# EAGLE board Sound Activation 2019 - Extended (EAGLE 9.3.1)
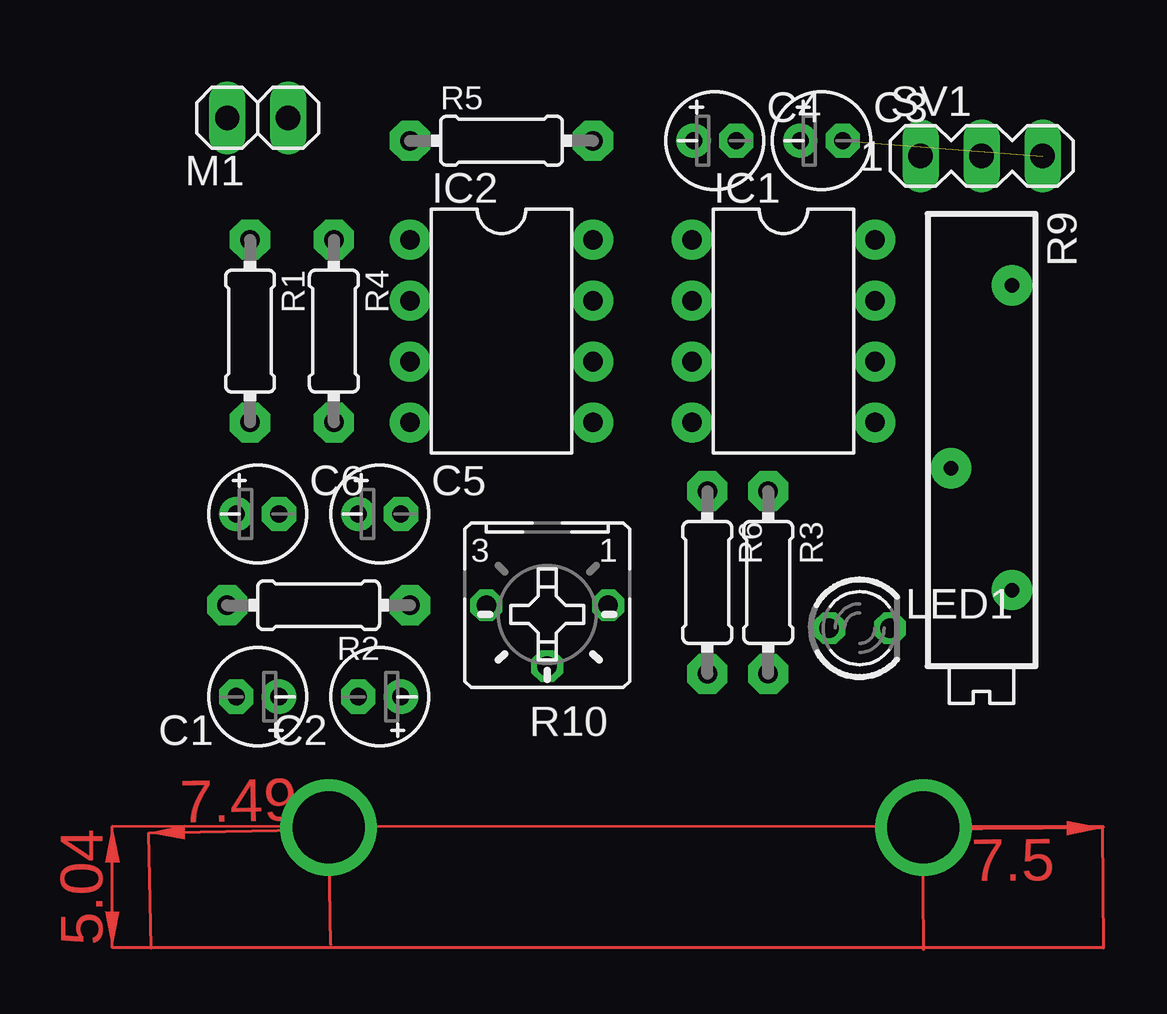
[diagram p0: board, top side]
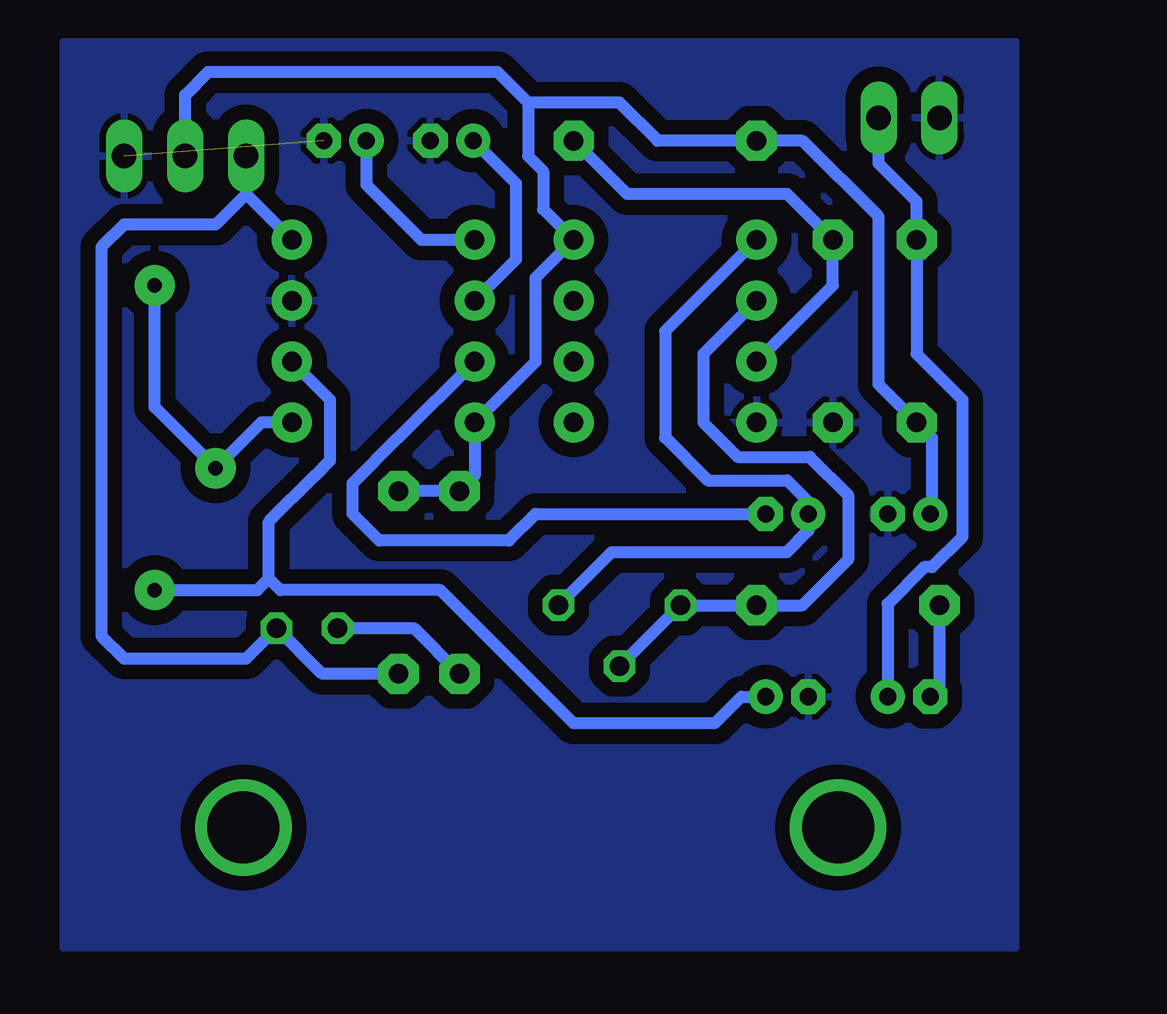
[diagram p1: board, bottom side, seen from below]

No outline drawn. Coordinates in mm, seen from the top.
Copper layers (1*16): Top 0.035mm / dielectric 1.5mm / Bottom 0.035mm
Design rules "default *": minimum track width 6mil, minimum drill 0.35mm, track to track 6mil, track to pad 6mil, pad to pad 6mil, via to via 6mil, smd to smd 6mil, copper to edge 40mil, drill to drill 6mil, minimum pad ring 10mil, minimum via ring 8mil, stop-mask expansion 4mil, vias tented up to drill 0mil, thermal gap 10mil

## Footprints (pad centres in the part's own frame; a part is rotated, then mirrored left to right if it is on the bottom)
E1,8-4 = drill 0.711 pad 1.422: + -0.889,0 | drill 0.711 pad 1.422 octagon: - 0.889,0
DIL08 = drill 0.813 pad 1.676: 1 -3.81,-3.81; 2 -1.27,-3.81; 3 1.27,-3.81; 4 3.81,-3.81; 5 3.81,3.81; 6 1.27,3.81; 7 -1.27,3.81; 8 -3.81,3.81
LED3MM = drill 0.813 octagon: A -1.27,0; K 1.27,0
1X02 = drill 1.016 long: 1 -1.27,0; 2 1.27,0
0204/7 = drill 0.813 pad 1.676 octagon: 1 -3.81,0; 2 3.81,0
RTRIM3006P = drill 0.61 pad 1.676: 1 -7.62,1.27; 2 0,-1.27; 3 5.08,1.27
B25P = drill 0.813 octagon: A -2.54,0; E 2.54,0; S 0,2.54
MA03-1 = drill 1.016 long: 1 -2.54,0; 2 0,0; 3 2.54,0

## Placement (x,y rotation side)
C1  1uF  [E1,8-4]  20.95,13.34 180 top
C2  0,1 uF  [E1,8-4]  26.04,13.34 180 top
C3  10 uF  [E1,8-4]  44.45,36.51 0 top
C4  2,2 uF  [E1,8-4]  40.01,36.51 0 top
C5  1uF  [E1,8-4]  26.04,20.95 0 top
C6  1uF  [E1,8-4]  20.95,20.95 0 top
IC1  LM567N  [DIL08]  42.86,28.57 270 top
IC2  LM358N  [DIL08]  31.11,28.57 270 top
LED1  [LED3MM]  46.04,16.19 0 top
M1  [1X02]  20.95,37.47 0 top
R1  1k  [0204/7]  20.64,28.57 270 top
R2  1k  [0204/7]  23.5,17.14 180 top
R3  330  [0204/7]  42.23,18.1 270 top
R4  1k  [0204/7]  24.13,28.57 270 top
R5  1k  [0204/7]  31.11,36.51 0 top
R6  330  [0204/7]  39.69,18.1 270 top
R9  10k  [RTRIM3006P]  51.12,22.86 270 top
R10  20k  [B25P]  33.02,17.14 180 top
SV1  [MA03-1]  51.12,35.88 0 top

## Library data of the parts
C1-C6 R1-R6 R9 = rcl
IC1 IC2 = linear
LED1 = led
M1 = pinhead
R10 = pot
SV1 = con-lstb; OC_FARNELL: unknown; OC_NEWARK: unknown

## Nets
GND: C2.- C3.- C4.- C6.- IC1.7 IC2.4 M1.1 R4.2 SV1.3
N$1: IC2.2 R2.1 R10.E R10.S
N$2: IC2.3 R4.1 R5.2
N$3: C1.+ M1.2 R1.1
N$4: C1.- R2.2
N$5: C2.+ IC1.6 R9.3
N$6: IC1.5 R9.1 R9.2
N$7: C5.+ IC2.1 R10.A
N$8: IC1.8 LED1.K R3.2 SV1.1
N$9: LED1.A R6.2
N$10: C5.- IC1.3
N$12: C3.+ IC1.1
N$13: C4.+ IC1.2
VCC: C6.+ IC1.4 IC2.8 R1.2 R3.1 R5.1 R6.1 SV1.2

## Tracks (layer width: path | path; a pad name or v marks a point on that pad's centre or on a via)
GND  (1 unrouted)
  Bottom 0.508: 45.34,36.89 C3.-
  pour Bottom (isolate 0.61): 16.51,40.64 56.2,40.64 56.2,2.86 16.51,2.86
N$1
  Bottom 0.508: R10.S R10.E R2.1 25.4,17.14 23.5,19.05 23.5,21.75 25.08,23.34 28.1,23.34 29.53,24.77 29.53,27.62 IC2.2
N$2
  Bottom 0.508: IC2.3 24.13,30.48 R4.1 26.04,34.29 32.7,34.29 R5.2
N$3
  Bottom 0.508: C1.+ 21.84,17.21 20.32,18.73 20,18.73 18.73,20 18.73,25.72 20.64,27.62 R1.1 20.64,33.97 22.23,35.56 M1.2
N$4
  Bottom 0.508: R2.2 19.68,13.72 C1.-
N$5
  Bottom 0.508: IC1.6 45.09,25.72 45.09,23.18 45.72,22.54 47.62,20.64 47.62,18.26 | C2.+ 27.94,13.34 29.05,12.22 34.92,12.22 40.48,17.78 47.15,17.78 47.62,18.26 | R9.3 48.1,17.78 47.62,18.26
N$6
  Bottom 0.508: IC1.5 47.94,24.77 R9.2 52.39,25.4 R9.1
N$7
  Bottom 0.508: R10.A 33.34,19.37 26.04,19.37 25.15,20.26 C5.+ 25.15,21.46 26.04,22.35 29.34,22.35 31.11,24.13 31.11,28.57 IC2.1
N$8
  Bottom 0.508: IC1.8 48.58,34.29 | 48.58,34.29 SV1.1 | 48.58,34.29 49.85,33.02 53.66,33.02 54.61,32.07 54.61,15.88 53.66,14.92 48.58,14.92 LED1.K 45.4,14.29 R3.2
N$9
  Bottom 0.508: LED1.A 41.59,16.19 R6.2
N$10
  Bottom 0.508: C5.- 36.51,20.95 37.62,19.84 43.02,19.84 44.13,20.95 44.13,22.23 42.23,24.13 IC1.3
N$11  (via drill 3)
  other vias: 23.91,7.88 48.69,7.88
N$12
  Bottom 0.508: C3.+ 43.56,34.67 41.27,32.38 IC1.1
N$13
  Bottom 0.508: C4.+ 37.34,34.73 37.34,31.56 IC1.2
VCC
  Bottom 0.508: SV1.2 51.12,38.42 50.16,39.37 38.1,39.37 36.83,38.1 | 36.83,38.1 33.02,38.1 31.43,36.51 R5.1 25.4,36.51 22.23,33.34 22.23,26.35 R1.2 20,24.13 20,21.02 C6.+ | 36.83,38.1 36.83,35.88 36.2,35.24 36.2,33.66 IC2.8 36.51,30.8 36.51,27.3 IC1.4 39.05,22.54 R6.1 R3.1
(copper drawn outside any net)
  shapes: Top area x3